# Altium PCB mainBoard.pcbdoc
Units mil, origin at the board's own origin, x right, y up, seen from the top; angles counter-clockwise.
Board outline 3937 x 3937.03 mil, 2 copper layers (Top Layer, Bottom Layer); 19 components, 22 nets, 95 pads, 51 vias.
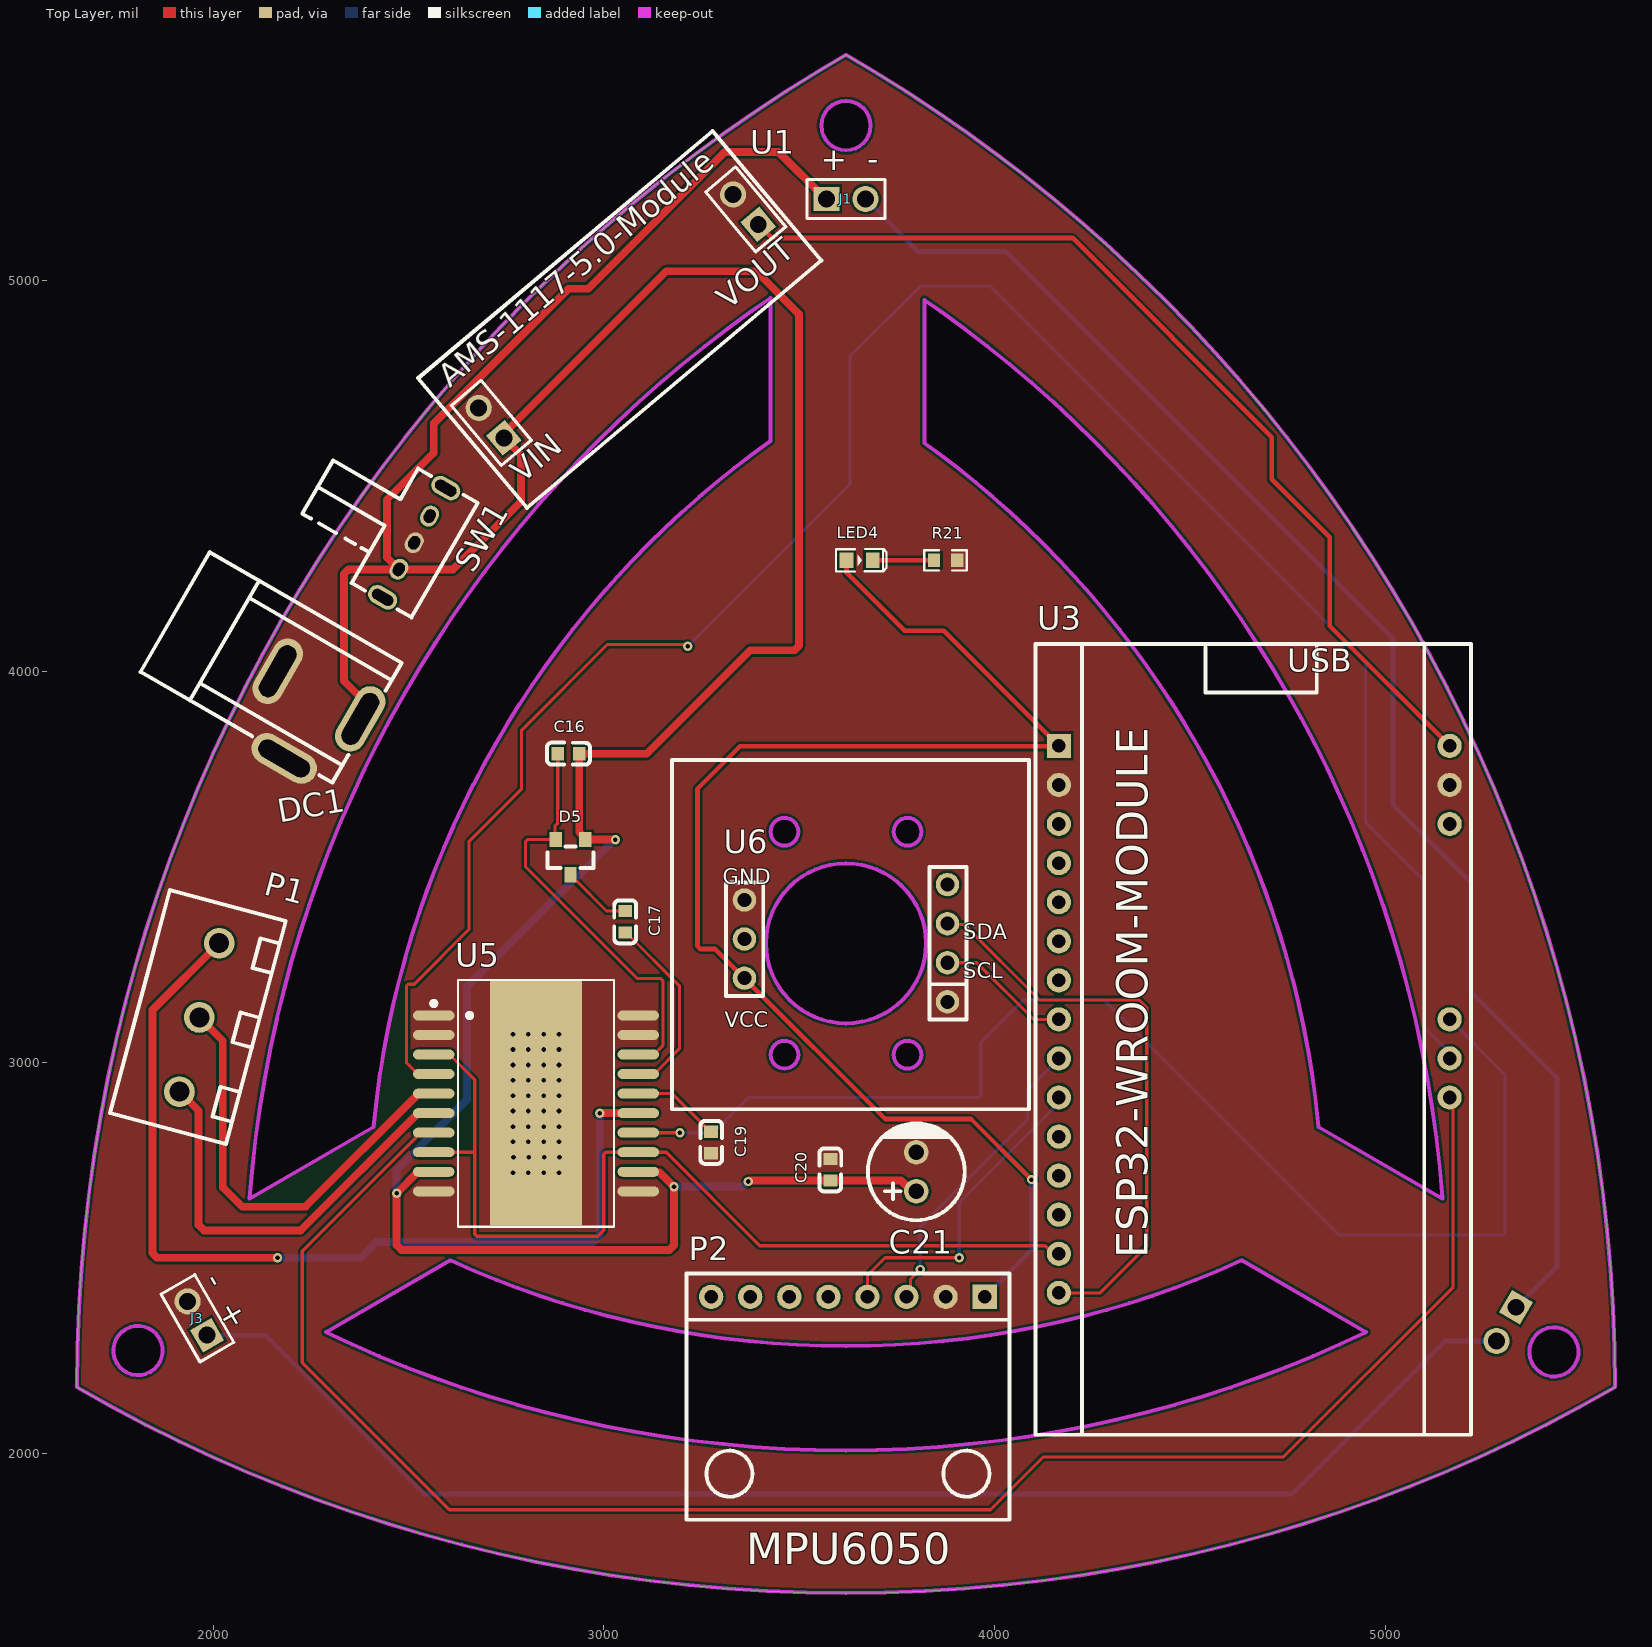
[diagram p0: Top Layer view]
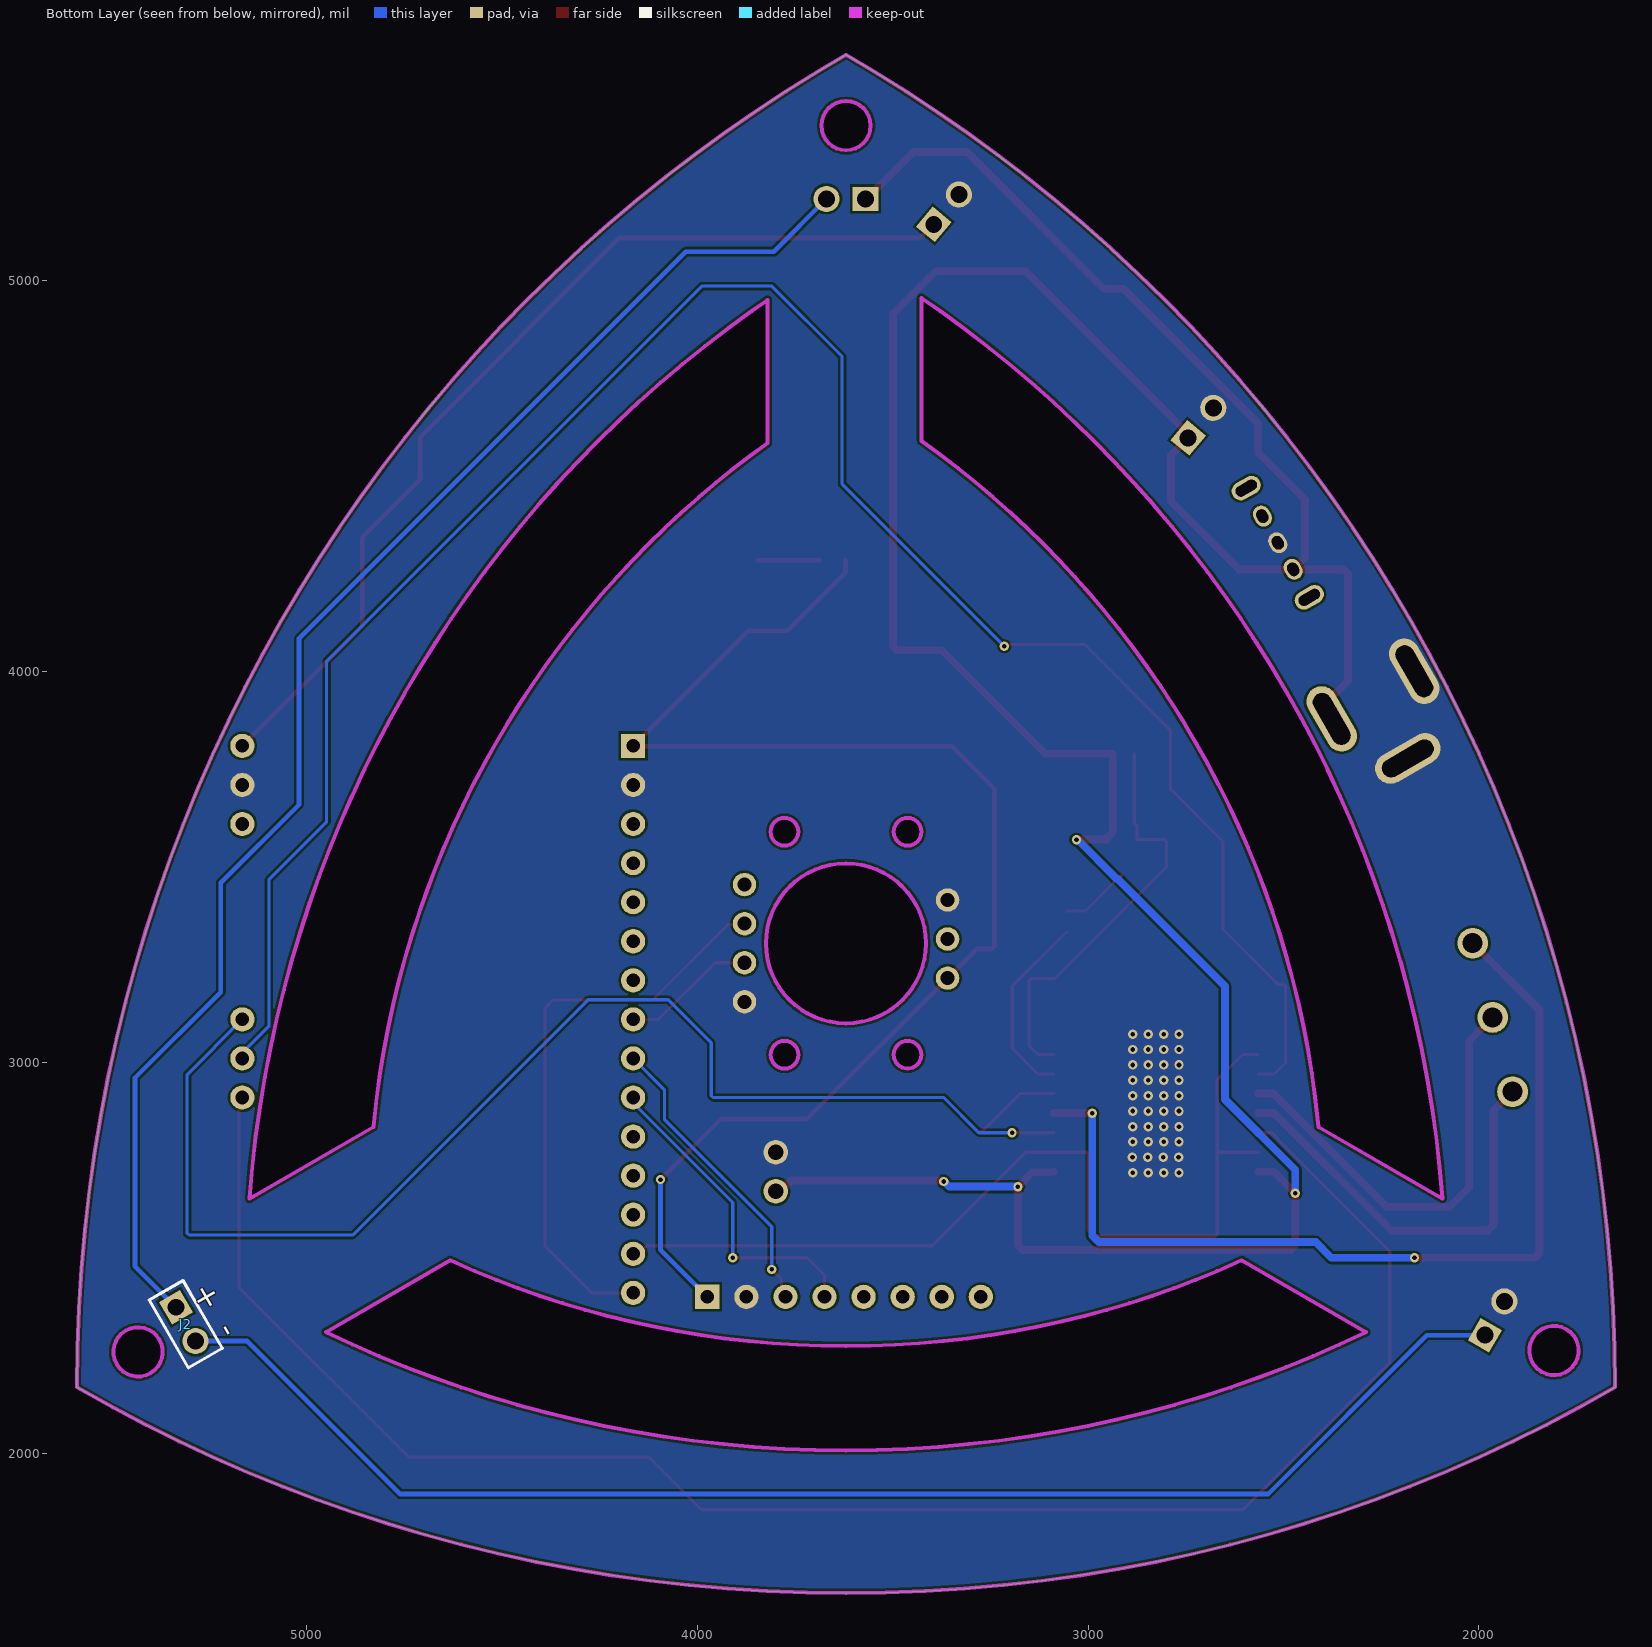
[diagram p1: Bottom Layer view, seen from below]

## Layer stack, top to bottom
Top Solder: solder mask 0.4, Solder Resist, Dk 3.5
Top Layer: signal copper 1.4
Dielectric1: dielectric 12.6, FR-4, Dk 4.8
Bottom Layer: signal copper 1.4
Bottom Solder: solder mask 0.4, Solder Resist, Dk 3.5

## Board outline
1651.59,2168.43 1743.32,2116.76 1827.57,2072.27 1913.1,2029.85 1999.72,1989.39 2087.51,1950.91 2176.39,1914.69 2266.25,1880.44 2357.2,1848.45 2449.22,1818.53 2542.14,1790.87 2636.04,1765.48 2730.82,1742.35 2826.49,1721.58 2923.04,1703.08 3020.38,1686.93 3118.52,1673.15 3217.43,1661.93 3317.04,1653.08 3417.43,1646.68 3518.42,1642.84 3619.99,1641.56 3721.57,1642.84 3822.55,1646.68 3922.94,1653.08 4022.55,1661.93 4121.37,1673.15 4219.6,1686.93 4316.94,1703.08 4413.39,1721.58 4509.07,1742.35 4603.85,1765.48 4697.74,1790.87 4790.76,1818.53 4882.69,1848.45 4973.63,1880.44 5063.59,1914.69 5152.47,1950.91 5240.17,1989.4 5326.78,2029.85 5412.31,2072.27 5496.56,2116.76 5588.59,2168.51 5587.31,2270.01 5583.47,2370.99 5577.07,2471.38 5568.21,2570.99 5557,2669.81 5543.22,2768.04 5527.08,2865.38 5508.57,2961.84 5487.8,3057.51 5464.67,3152.29 5439.28,3246.19 5411.62,3339.2 5381.7,3431.12 5349.71,3522.07 5315.46,3612.03 5279.24,3700.91 5240.76,3788.61 5200.3,3875.22 5157.88,3960.75 5113.39,4045 5066.93,4128.08 5018.61,4209.86 4968.31,4290.38 4916.25,4369.61 4862.21,4447.47 4806.4,4523.94 4748.83,4599.04 4689.58,4672.76 4628.55,4744.9 4565.85,4815.57 4501.48,4884.67 4435.44,4952.28 4367.82,5018.33 4298.73,5082.7 4228.06,5145.4 4155.91,5206.42 4082.19,5265.67 4007.09,5323.25 3930.62,5379.06 3852.76,5433.09 3773.53,5485.16 3693.02,5535.45 3620.01,5578.59 3547.15,5535.45 3466.64,5485.26 3387.41,5433.09 3309.55,5379.06 3233.08,5323.35 3157.98,5265.77 3084.26,5206.42 3012.11,5145.4 2941.44,5082.7 2872.35,5018.33 2804.73,4952.29 2738.69,4884.77 2674.32,4815.57 2611.62,4744.9 2550.6,4672.76 2491.35,4599.14 2433.77,4524.03 2377.96,4447.56 2323.93,4369.71 2271.86,4290.47 2221.56,4209.96 2173.24,4128.17 2126.78,4045.1 2082.29,3960.75 2039.87,3875.32 1999.42,3788.7 1960.94,3700.91 1924.71,3612.03 1890.46,3522.17 1858.47,3431.12 1828.55,3339.2 1800.9,3246.28 1775.5,3152.38 1752.37,3057.6 1731.61,2961.93 1713.1,2865.38 1696.96,2768.03 1683.18,2669.9 1671.96,2570.99 1663.1,2471.38 1656.7,2370.99 1652.87,2270
cut-out: 3442.82,3560.8 3448.82,3557.55 3455.42,3555.49 3462.6,3554.79 3469.79,3555.48 3476.38,3557.55 3482.39,3560.8 3487.7,3565.13 3492.03,3570.44 3495.28,3576.45 3497.35,3583.04 3498.03,3590.23 3497.34,3597.41 3495.28,3604.01 3492.03,3610.01 3487.7,3615.32 3482.39,3619.66 3476.38,3622.91 3469.79,3624.97 3462.6,3625.66 3455.42,3624.97 3448.82,3622.91 3442.82,3619.66 3437.5,3615.32 3433.18,3610.01 3429.93,3604.01 3427.86,3597.41 3427.17,3590.23 3427.86,3583.04 3429.93,3576.45 3433.18,3570.44 3437.5,3565.13
cut-out: 2093.39,2653.27 2100.48,2733.79 2109.24,2810.95 2119.98,2887.49 2132.58,2963.42 2147.01,3038.73 2163.21,3113.35 2181.25,3187.29 2201.05,3260.52 2222.62,3333 2245.96,3404.7 2270.92,3475.72 2297.63,3545.81 2325.88,3615.13 2355.9,3683.61 2387.45,3751.17 2420.54,3817.81 2455.24,3883.6 2491.48,3948.4 2529.18,4012.19 2568.4,4075 2609.02,4136.8 2651.17,4197.52 2694.7,4257.18 2739.61,4315.75 2785.82,4373.18 2833.42,4429.45 2882.33,4484.58 2932.53,4538.54 2984.05,4591.21 3036.79,4642.72 3090.69,4692.93 3145.8,4741.84 3202.08,4789.43 3259.58,4835.73 3318.16,4880.64 3377.81,4924.09 3427.02,4958.25 3427.02,4592.74 3380.09,4558.56 3333.53,4522.86 3287.82,4486.06 3243.09,4448.23 3199.28,4409.36 3156.44,4369.45 3114.52,4328.5 3073.57,4286.64 3033.66,4243.75 2994.79,4199.93 2956.96,4155.2 2920.22,4109.56 2884.53,4063 2849.93,4015.58 2816.42,3967.31 2784.15,3918.19 2752.96,3868.28 2723,3817.57 2694.2,3766.06 2666.62,3713.77 2640.32,3660.8 2615.23,3607.1 2591.37,3552.67 2568.92,3497.57 2547.68,3441.85 2527.85,3385.41 2509.3,3328.41 2492.15,3270.81 2476.41,3212.59 2462.07,3153.83 2449.19,3094.52 2437.72,3034.65 2427.71,2974.3 2419.17,2913.46 2410.83,2836.54
cut-out: 4355.67,4061.01 4319.98,4107.58 4283.24,4153.28 4245.41,4198.01 4206.54,4241.83 4166.63,4284.66 4125.68,4326.59 4083.76,4367.53 4040.92,4407.44 3997.11,4446.31 3952.38,4484.15 3906.67,4520.88 3860.11,4556.58 3820.86,4585.22 3820.87,4950.99 3862.39,4922.17 3922.04,4878.64 3980.61,4833.73 4038.12,4787.51 4094.39,4739.92 4149.52,4691.02 4203.41,4640.81 4256.15,4589.29 4307.67,4536.55 4357.87,4482.65 4406.78,4427.53 4454.38,4371.26 4500.59,4313.76 4545.5,4255.18 4589.03,4195.53 4631.18,4134.8 4671.79,4073 4711.02,4010.2 4748.72,3946.41 4784.95,3881.61 4819.65,3815.89 4852.74,3749.18 4884.3,3681.62 4914.32,3613.22 4942.57,3543.89 4969.28,3473.72 4994.23,3402.78 5017.57,3331.08 5039.15,3258.53 5058.95,3185.29 5076.99,3111.36 5093.19,3036.74 5107.63,2961.5 5120.22,2885.57 5130.96,2808.96 5139.72,2731.88 5146.81,2651.26 4829.38,2834.54 4821.03,2911.49 4812.49,2972.39 4802.48,3032.73 4791.01,3092.54 4778.13,3151.85 4763.79,3210.61 4748.05,3268.83 4730.89,3326.5 4712.35,3383.49 4692.52,3439.87 4671.28,3495.65 4648.82,3550.75 4624.97,3605.12 4599.88,3658.82 4573.59,3711.85 4546,3764.08 4517.2,3815.59 4487.24,3866.3 4456.06,3916.21 4423.77,3965.33 4390.27,4013.6
cut-out: 3748.13,3570.44 3744.88,3576.45 3742.82,3583.04 3742.13,3590.23 3742.82,3597.41 3744.88,3604.01 3748.13,3610.01 3752.46,3615.32 3757.78,3619.66 3763.78,3622.9 3770.38,3624.97 3777.56,3625.66 3784.75,3624.97 3791.34,3622.91 3797.35,3619.66 3802.66,3615.33 3806.99,3610.01 3810.24,3604.01 3812.31,3597.41 3812.99,3590.23 3812.31,3583.04 3810.24,3576.45 3806.99,3570.45 3802.66,3565.13 3797.34,3560.8 3791.34,3557.55 3784.75,3555.49 3777.56,3554.8 3770.38,3555.48 3763.78,3557.55 3757.78,3560.8 3752.46,3565.13
cut-out: 3450.42,3190.22 3440.19,3207.11 3431.57,3225.03 3424.66,3243.79 3419.63,3263.41 3416.47,3283.8 3415.45,3304.7 3416.47,3325.59 3419.63,3345.98 3424.66,3365.6 3431.57,3384.37 3440.19,3402.28 3450.42,3419.17 3462.2,3434.95 3475.42,3449.45 3489.92,3462.68 3505.7,3474.45 3522.59,3484.69 3540.5,3493.3 3559.27,3500.21 3578.89,3505.24 3599.28,3508.4 3620.17,3509.42 3641.07,3508.4 3661.38,3505.24 3680.99,3500.21 3699.85,3493.3 3717.76,3484.68 3734.65,3474.45 3750.35,3462.68 3764.93,3449.46 3778.16,3434.95 3789.93,3419.17 3800.16,3402.28 3808.78,3384.37 3815.69,3365.61 3820.72,3345.98 3823.88,3325.6 3824.9,3304.7 3823.79,3283.71 3820.72,3263.41 3815.69,3243.8 3808.78,3225.03 3800.16,3207.11 3789.93,3190.22 3778.16,3174.53 3764.93,3159.94 3750.35,3146.72 3734.65,3134.95 3717.76,3124.71 3699.85,3116.1 3681.08,3109.18 3661.46,3104.15 3641.07,3101 3620.17,3099.97 3599.28,3101 3578.89,3104.15 3559.27,3109.18 3540.5,3116.1 3522.59,3124.71 3505.7,3134.95 3489.92,3146.72 3475.42,3159.94 3462.2,3174.52
cut-out: 3748.03,2999.68 3744.79,3005.68 3742.72,3012.28 3742.03,3019.46 3742.72,3026.65 3744.79,3033.24 3748.03,3039.24 3752.36,3044.56 3757.68,3048.89 3763.68,3052.14 3770.28,3054.21 3777.46,3054.89 3784.65,3054.21 3791.24,3052.14 3797.25,3048.89 3802.56,3044.56 3806.89,3039.24 3810.14,3033.24 3812.21,3026.65 3812.9,3019.46 3812.21,3012.28 3810.14,3005.68 3806.89,2999.68 3802.56,2994.36 3797.25,2990.03 3791.24,2986.79 3784.65,2984.72 3777.46,2984.03 3770.28,2984.72 3763.68,2986.78 3757.68,2990.03 3752.37,2994.36
cut-out: 3427.96,3012.38 3427.27,3019.55 3427.95,3026.64 3430.02,3033.34 3433.27,3039.34 3437.6,3044.56 3442.82,3048.89 3448.82,3052.23 3455.52,3054.3 3462.6,3054.99 3469.79,3054.31 3476.38,3052.24 3482.39,3048.89 3487.7,3044.56 3492.03,3039.34 3495.28,3033.34 3497.35,3026.64 3498.03,3019.56 3497.35,3012.38 3495.28,3005.78 3492.03,2999.77 3487.7,2994.46 3482.39,2990.13 3476.38,2986.88 3469.79,2984.81 3462.6,2984.12 3455.51,2984.81 3448.82,2986.88 3442.82,2990.13 3437.6,2994.46 3433.27,2999.78 3430.02,3005.78
cut-out: 5375.41,2231.33 5381.71,2220.99 5390.18,2211.94 5400.51,2204.46 5412.12,2199.24 5424.23,2196.48 5436.44,2196.19 5448.35,2198.16 5459.66,2202.39 5470.1,2208.69 5479.15,2217.16 5486.63,2227.49 5491.85,2239.1 5494.6,2251.21 5494.9,2263.32 5492.93,2275.22 5488.7,2286.55 5482.3,2296.98 5473.84,2306.03 5463.5,2313.51 5451.89,2318.73 5439.78,2321.48 5427.68,2321.78 5415.77,2319.81 5404.45,2315.58 5394.01,2309.28 5384.96,2300.82 5377.48,2290.48 5372.26,2278.87 5369.51,2266.76 5369.21,2254.55 5371.18,2242.65
cut-out: 2779.37,2123.38 2852.61,2103.58 2926.54,2085.53 3001.17,2069.34 3076.47,2054.9 3152.41,2042.31 3228.95,2031.56 3306.1,2022.81 3383.8,2015.9 3462.1,2010.91 3540.87,2007.92 3620.1,2006.92 3699.33,2007.92 3778.09,2010.91 3856.4,2015.9 3934.09,2022.81 4011.18,2031.56 4087.79,2042.31 4163.72,2054.9 4238.95,2069.34 4313.58,2085.54 4387.51,2103.58 4460.75,2123.38 4533.3,2144.96 4605,2168.3 4675.94,2193.25 4746.11,2219.96 4815.43,2248.22 4883.84,2278.23 4951.1,2309.65 4632.76,2493.45 4570.23,2465.78 4515.13,2443.32 4459.35,2422.09 4402.97,2402.25 4345.97,2383.7 4288.31,2366.56 4230.09,2350.81 4171.33,2336.47 4112.02,2323.6 4052.21,2312.13 3991.86,2302.12 3930.96,2293.57 3869.7,2286.62 3807.94,2281.12 3745.7,2277.16 3683.09,2274.78 3620.11,2273.99 3557.14,2274.78 3494.53,2277.16 3432.29,2281.12 3370.53,2286.62 3309.2,2293.57 3248.37,2302.12 3188.02,2312.13 3128.16,2323.6 3068.84,2336.47 3010.08,2350.81 2951.86,2366.56 2894.26,2383.7 2837.2,2402.25 2780.82,2422.08 2725.1,2443.32 2670,2465.78 2607.43,2493.44 2289.07,2309.63 2356.28,2278.23 2424.76,2248.22 2494.09,2219.96 2564.18,2193.24 2635.12,2168.3 2706.9,2144.96
cut-out: 1753.46,2230.83 1748.25,2242.45 1745.49,2254.55 1745.2,2266.76 1747.16,2278.67 1751.4,2289.99 1757.7,2300.42 1766.16,2309.48 1776.49,2316.96 1788.11,2322.18 1800.22,2324.93 1812.42,2325.22 1824.33,2323.26 1835.65,2319.02 1845.98,2312.63 1855.04,2304.16 1862.52,2293.83 1867.73,2282.21 1870.49,2270.11 1870.79,2258 1868.82,2246.09 1864.59,2234.77 1858.29,2224.34 1849.82,2215.28 1839.49,2207.8 1827.87,2202.59 1815.77,2199.83 1803.66,2199.54 1791.75,2201.5 1780.43,2205.74 1770,2212.04 1760.94,2220.5
cut-out: 3567.74,5362.33 3561.93,5373.06 3558.29,5384.87 3557.01,5397.57 3558.29,5410.26 3561.93,5422.08 3567.74,5432.81 3575.51,5442.15 3584.76,5449.83 3595.49,5455.64 3607.3,5459.28 3620,5460.56 3632.7,5459.28 3644.51,5455.64 3655.24,5449.83 3664.59,5442.15 3672.26,5432.81 3678.07,5422.08 3681.71,5410.26 3682.99,5397.57 3681.71,5384.87 3678.07,5373.06 3672.26,5362.33 3664.59,5353.08 3655.24,5345.3 3644.51,5339.5 3632.7,5335.85 3620,5334.57 3607.3,5335.85 3595.49,5339.5 3584.76,5345.3 3575.51,5353.08

## Design rules (kind name [scope] priority, off if disabled: settings)
Clearance [All] p1: gap=6 ignorepadtopadclearanceinfootprint=FALSE
ComponentClearance [All] p1: gap=5 collisioncheckmode=3 verticalgap=5 showdistances=FALSE
HoleSize [All] p1: absolutevalues=TRUE maxlimit=200 minlimit=1 maxpercent=80.000 minpercent=20.000
MinimumSolderMaskSliver [All] p1: minsoldermaskwidth=5
PlaneClearance [All] p1: clearance=10
PlaneConnect [All] p1: planeconnectstyle=Direct reliefexpansion=20 reliefentries=4 reliefconductorwidth=10 reliefairgap=10
PolygonConnect [All] p1: connectstyle=Direct reliefconductorwidth=10 reliefentries=4 polygonreliefangle="90 Angle" airgapwidth=10
RoutingVias [All] p1: holewidth=11.81 width=23.62 viastyle="Through Hole" minholewidth=11.81 minwidth=23.62 maxholewidth=28 maxwidth=23.62
SilkToSilkClearance [All] p1: silktosilkclearance=0
SilkToSolderMaskClearance [IsPad] p1: minsilkscreentomaskgap=0 clearancetoexposedcopper=TRUE
SolderMaskExpansion [All] p1: expansion=4 istentingtop=FALSE
Width [All] p1: maxlimit=20 minlimit=6 preferedwidth=10
23 further rules are at their usual default settings.

## Components (designator, comment, footprint, x,y, rotation, side; value= is the part's Value field where it differs from the comment)
C16 "220nF" C0603 2910,3790 r0 top
C17 "10nF" C0603 3055,3360 r90 top
C19 "1uF" C0603 3275,2795 r270 top
C20 "100nF" C0603 3580,2725 r90 top
C21 "100uF" CAP-TH_BD6.3-P2.50-D1.0-FD 3800,2720 r90 top
D5 "LBAT54SLT1G" SOT-23_L2.9-W1.3-P1.90-LS2.4-BR 2915,3525 r90 top
DC1 "12V INPUT" DC-IN-TH_DC005 2225,3860 r330 top
J1 "HDR-M-2.54_1x2" HDR-M-2.54_1X2 3620,5210 r0 top
J2 "HDR-M-2.54_1x2" HDR-M-2.54_1X2 5310,2330 r240 bottom
J3 "HDR-M-2.54_1x2" HDR-M-2.54_1X2 1960,2345 r120 top
LED4 "LED-0603_R" LED0603_RED 3655,4285 r0 top
P1 "WJ126V-5.0-3P" CONN-TH_3P-P5.00_WJ126V-5.0-3P 1964.99,3114.95 r255 top
P2 "MPU6050模块" MPU6050模块 3275,2400 r270 top
R21 "1K" R0603 3875,4285 r180 top
SW1 "SK-12D02-VG5" SW-TH_SK-12D02-VG5 2515,4330 r240 top
U1 "AMS1117-5.0-Module" AMS1117-3.3-MODULE 2566.29,4227.12 r40 top
U3 "ESP_32_WROOM_Module" ESP32_MODULE 4080,3226.85 r0 top
U5 "L6234PD013TR" POWERSO20_L15.9-W11.0-P1.27-LS14.2-BL-EP 2826.72,2895 r270 top
U6 "AS5600_Modle" AS5600_MODLE 3620,3305 r0 top

## Footprints (in the part's own frame and the unit in brackets; to place one, negate y for a bottom-side part, rotate by r counter-clockwise, add the part's x,y. Pads: shape width x height; smd on the part's side, far side on the other; paste and mask are expansions set on the pad)
AMS1117-3.3-MODULE [mil]
  rect 62x66.93 hole 43.31: 1(375,170) 3(1225,170)
  round 66.93 hole 43.31: 2(375,270) 4(1225,270)
  silkscreen extent 305,-5 1289,428
AS5600_MODLE [mil]
  round 60 hole 36: 1(-259.84,110.63) 2(-259.84,10.63) 3(-259.84,-89.37) 4(259.84,150) 5(259.84,50) 6(259.84,-50) 7(259.84,-150)
  silkscreen extent -445,-425 468,469
C0603 [mm]
  rect 0.8x0.9 smd: 1(-0.7,0) 2(0.7,0)
  silkscreen extent -1.41,-0.71 1.39,0.72
CAP-TH_BD6.3-P2.50-D1.0-FD [mm]
  round 1.6 hole 1: 1(-1.27,0) 2(1.27,0)
  silkscreen extent -3.15,-3.15 3.17,3.15
CONN-TH_3P-P5.00_WJ126V-5.0-3P [mm]
  round 2 hole 1.3: 1(5,0) 2(-0.001,0) 3(-5,0)
  silkscreen extent -7.5,-4 7.5,3.8
DC-IN-TH_DC005 [mm]
  oval 2x4.6 hole 1.2 slot 3.7 at 90 deg: 1(3.1,2.35) 2(-3.1,2.35)
  oval 4.6x2 hole 1.2 slot 3.7 at 0 deg: 3(0.1,-2.35)
  silkscreen extent -10.8,-2.15 3.6,6.85
ESP32_MODULE [mil]
  rect 62x62 hole 35: 1(85,583.15)
  round 62 hole 35: 2(85,483.15) 3(85,383.15) 4(85,283.15) 5(85,183.15) 6(85,83.15) 7(85,-16.85) 8(85,-116.85) 9(85,-216.85) 10(85,-316.85) 11(85,-416.85) 12(85,-516.85) 13(85,-616.85) 14(85,-716.85) 15(85,-816.85) 21(1085,-316.85) 22(1085,-216.85) 23(1085,-116.85) 28(1085,383.15) 29(1085,483.15) 30(1085,583.15)
  silkscreen extent 25,-1180 1140,845
HDR-M-2.54_1X2 [mm]
  rect 1.7x1.575 hole 1.1: 1(-1.27,0)
  round 1.7 hole 1.1: 2(1.27,0)
  silkscreen extent -2.54,-1.27 2.54,1.27
LED0603_RED [mm]
  rect 0.9x1 smd: 1(-0.85,0) 2(0.85,0)
  silkscreen extent -1.54,-0.73 1.75,0.73
MPU6050模块 [mil]
  rect 62x62 hole 35: 1(0,700)
  round 62 hole 35: 2(0,600) 3(0,500) 4(0,400) 5(0,300) 6(0,200) 7(0,100) 8(0,0)
  silkscreen extent -59,-63 571,763
POWERSO20_L15.9-W11.0-P1.27-LS14.2-BL-EP [mm]
  oval 0.651x2.695 smd: 1(-5.715,-6.648) 2(-4.445,-6.648) 3(-3.175,-6.648) 4(-1.905,-6.648) 5(-0.635,-6.648) 6(0.635,-6.648) 7(1.905,-6.648) 8(3.175,-6.648) 9(4.445,-6.648) 10(5.715,-6.648) 11(5.715,6.648) 12(4.445,6.648) 13(3.175,6.648) 14(1.905,6.648) 15(0.635,6.648) 16(-0.635,6.648) 17(-1.905,6.648) 18(-3.175,6.648) 19(-4.445,6.648) 20(-5.715,6.648)
  rect 15.9x6 smd: 21(0,0)
  silkscreen extent -8.03,-6.8 8.03,5.07
R0603 [mil]
  rect 31.75x34.02 smd: 1(-29.65,0) 2(29.65,0)
  silkscreen extent -55,-26 55,26
SOT-23_L2.9-W1.3-P1.90-LS2.4-BR [mm]
  rect 1x0.8 smd: 1(1.15,-0.95) 2(1.15,0.95) 3(-1.15,0)
  silkscreen extent -0.7,-1.5 0.7,1.5
SW-TH_SK-12D02-VG5 [mm]
  oval 1.4x1.1 hole 0.7 slot 0.9 at 0 deg: 1(-2,0.001) 2(0,0) 3(2,-0.001)
  oval 1.2x2 hole 0.7 slot 1.5 at 90 deg: 4(4.1,0) 5(-4.1,0)
  silkscreen extent -4.3,-7.25 4.3,2.27

## Part data
C16: library part 1uF, Contributor=LCEDA_Lib, nameAlias=Value(F), spicePre=C, spiceSymbolName=C_0603_US
C17: BOM_JLCPCB Part Class="Extended Part", BOM_Manufacturer=YAGEO, BOM_Manufacturer Part=CC0603KRX7R9BB103, BOM_Supplier=LCSC, BOM_Supplier Part=C100042, nameAlias=Capacitance, spicePre=C, spiceSymbolName=CC0603KRX7R9BB103
C19: library part 220nF, Contributor=LCEDA_Lib, nameAlias=Value(F), spicePre=C, spiceSymbolName=C_0603_US
C20: Package Display=No, BOM_Supplier=LCSC, BOM_Supplier Part=C14663, Contributor=LCEDA_Lib, nameAlias=Value(F), spicePre=C, spiceSymbolName=C_0603_US
C21: BOM_JLCPCB Part Class="Extended Part", BOM_Manufacturer=ValuePro, BOM_Manufacturer Part="100uF 25V 6.3*7", BOM_Supplier=LCSC, BOM_Supplier Part=C44587, nameAlias=Capacitance, spicePre=C, spiceSymbolName="100uF 25V 6.3*7"
D5: BOM_JLCPCB Part Class="Extended Part", BOM_Manufacturer=LRC, BOM_Manufacturer Part=LBAT54SLT1G, BOM_Supplier=LCSC, BOM_Supplier Part=C12765, spicePre=D, spiceSymbolName=LBAT54SLT1G
DC1: library part 总电源输入5V, BOM_Manufacturer="Shenzhen Cankemeng", BOM_Manufacturer Part=-, BOM_Supplier=LCSC, BOM_Supplier Part=C132516, Contributor=LCSC, spicePre=D, spiceSymbolName="dc-005 5.5-2.0"
LED4: BOM_Manufacturer=EVERLIGHT(台湾亿光), BOM_Manufacturer Part=19-217/R6C-AL1M2VY/3T, BOM_Supplier=LCSC, BOM_Supplier Part=C72044, Contributor=LCEDA_01, spicePre=L, spiceSymbolName=LED-0603_R
P1: BOM_JLCPCB Part Class="Extended Part", BOM_Manufacturer=ReliaPro, BOM_Manufacturer Part=WJ126V-5.0-3P, BOM_Supplier=LCSC, BOM_Supplier Part=C8401, spicePre=P, spiceSymbolName=WJ126V-5.0-3P
SW1: BOM_JLCPCB Part Class="Extended Part", BOM_Manufacturer="Rectangular Connectors - Contacts", BOM_Manufacturer Part=SK-12D02-VG5, BOM_Supplier=LCSC, BOM_Supplier Part=C136722, Contributor=LCSC, spicePre=S, spiceSymbolName=SK-12D02-VG5
U5: BOM_JLCPCB Part Class="Extended Part", BOM_Manufacturer=STMicroelectronics, BOM_Manufacturer Part=L6234PD013TR, BOM_Supplier=LCSC, BOM_Supplier Part=C77581, spicePre=U, spiceSymbolName=L6234PD013TR
J1 J2 J3: BOM_Supplier=LCSC, BOM_Supplier Part=C124375, Contributor=LCEDA_Lib, spicePre=J, spiceSymbolName=HDR-M-2.54_1x2
P2: spicePre=P, spiceSymbolName=MPU6050模块
R21: Contributor=LCEDA_Lib, nameAlias=Value(Ω), spicePre=R, spiceSymbolName=R_0603_EU
U6: Contributor=45coll, spicePre=U, spiceSymbolName=AS5600_Modle, 淘宝ID=https://item.taobao.com/item.htm?spm=a1z09.2.0.0.2d022e8duL4IzW&id=622544987536&_u=31sddf3scb0c

## Via types
v1: diameter 24, hole 12, Top Layer to Bottom Layer, 40 vias
v2: diameter 23.62, hole 11.81, Top Layer to Bottom Layer, tented both sides, 11 vias

## Nets (pads, with @x,y where several pads share a name; then routed paths per layer and width w, separated by ;. In a path a pad name is that pad's centre, name@x,y a point inside that pad or via, vN(x,y) a via of type N, cw(c..) or ccw(c..) an arc to the next point about the centre after c; other vN are vias at no path point)
5Vin: U1.3 U3.30 | length 2518.7
  Top Layer w12: U1.3 3430.18,5110 4200,5110 4710,4600 4710,4492.23 4858.13,4344.1 4858.13,4116.87 U3.30
+3.3V: LED4.1 P2.1 U3.1 U6.3 | length 3589.1
  Top Layer w12: LED4.1 3621.53,4253.47 3770,4105 3870,4105 U3.1@4164.88,3810.12 ; v2(4095,2700) 3940,2855 3720.78,2855 U6.3 3285.78,3290 3247.03,3290 3240,3297.03 3240,3700 3348.83,3808.83 4163.83,3808.83 U3.1
  Bottom Layer w12: P2.1 4095,2520 v2(4095,2700) v2@4100,2700
BatVin: C16.2 C20.1 C21.1 D5.1 DC1.1 J1.1 SW1.3 U1.1 U5.9 U5.12 | length 8696.9
  Top Layer w20: DC1.1 2376.95,3934.88 2335,3976.83 2335,4250.11 2346.72,4261.83 SW1.3 ; U5.9 2524.75,2720 v2(2470,2665.25) 2470,2531.72 2481.72,2520 3168.28,2520 3180,2531.72 v2(3180,2681.88) 3142.96,2718.92 3089.52,2718.92 U5.12 ; v2(3030,3570) 3029.86,3570.14 2952.54,3570.14 D5.1 2952.41,3574.21 2937.55,3589.06 C16.2 3110,3790 3375,4055 3488.28,4055 3500,4066.72 3500,4915 3390,5025 3160.23,5025 2744.28,4609.05 U1.1 2788.59,4554.08 2788.59,4436.03 2614.39,4261.83 SW1.3 ; v2(3370,2695) 3372.45,2697.45 C20.1 3760.92,2697.45 3788.37,2670 C21.1 ; J1.1 3567.54,5210 3447.54,5330 3310,5330 2960,4980 2910,4980 2565,4635 2565,4560 2445,4440 2445,4292.43 SW1.3
  Bottom Layer w20: v2(2470,2665.25) 2470,2725 2650,2905 2650,3195 2925,3470 2927.63,3470 3025.82,3568.19 3027.21,3568.19 3029.02,3570 v2(3030,3570) ; v2(3180,2681.88) 3355.9,2681.88 3369.02,2695 v2(3370,2695)
GND: C19.2 C20.2 C21.2 DC1.2 DC1.3 J3.2 P2.2 R21.1 SW1.2 U1.2 U1.4 U3.2 U3.29 U5.1 U5.2 U5.10 U5.11 U5.19 U5.20 U5.21 U6.1 U6.7
  other v1: 2767.67,2717.84 2807.04,2717.84 2846.41,2717.84 2885.78,2717.84 2768.86,2757.2 2808.23,2757.2 2847.6,2757.2 2886.96,2757.2 2767.67,2796.57 2807.04,2796.57 2846.41,2796.57 2885.78,2796.57 2767.67,2835.34 2807.04,2835.34 2846.41,2835.34 2885.78,2835.34 2767.67,2875.32 2807.04,2875.32 2846.41,2875.32 2885.78,2875.32 2767.67,2914.68 2807.04,2914.68 2846.41,2914.68 2885.78,2914.68 2767.67,2954.05 2807.04,2954.05 2846.41,2954.05 2885.78,2954.05 2767.67,2993.43 2807.04,2993.43 2846.41,2993.43 2885.78,2993.43 2767.67,3032.8 2807.04,3032.8 2846.41,3032.8 2885.78,3032.8 2767.67,3072.16 2807.04,3072.16 2846.41,3072.16 2885.78,3072.16
M0_EN: U3.14 U5.3 U5.8 U5.13 | length 2442.4
  Top Layer w8: U5.8 2665.31,2770 2670,2765.31 ; U5.3 2605.25,3020 2670,2955.25 2670,2765.31 ; U3.14 4150.39,2510 4129.68,2530.7 3399.3,2530.7 3160,2770 U5.13 3004.69,2770 3000,2765.31 3000,2570 2985,2555 2674.69,2555 2670,2559.69 2670,2765.31
M0_IN1: U3.21 U5.7 | length 4575.2
  Top Layer w8: U5.7 2529.52,2820 2518.72,2809.2 2518.72,2806.94 2228.44,2516.65 2228.44,2231.56 2605,1855 3990,1855 4125,1990 4739.4,1990 5174.02,2424.62 5174.02,2900.98 U3.21
M0_IN2: U3.22 U5.4 | length 5392.9
  Top Layer w8: U5.4 2524.75,2970 2495,2999.75 2495,3195.31 2499.69,3200 2515,3200 2655,3340 2655,3565 2789.92,3699.92 2789.92,3849.92 3009.7,4069.7 3202.5,4069.7 3204.21,4067.99 3212.01,4067.99 v2(3215,4065)
  Bottom Layer w8: v2(3215,4065) 3630,4480 3630,4806.71 3810.16,4986.87 3988.97,4986.87 4949.36,4026.49 4949.36,3615.64 5097.34,3467.66 5097.34,3092.27 5165,3024.61 U3.22
M0_IN3: U3.23 U5.14 | length 3295.4
  Top Layer w8: U5.14 v2(3195,2820)
  Bottom Layer w8: v2(3195,2820) 3280,2820 3370,2910 3960.31,2910 3965,2914.69 3965,3050 4075.1,3160.1 4279.9,3160.1 4879.67,2560.33 4882.02,2557.98 5301.75,2557.98 5306.43,2562.67 5306.43,2968.57 U3.23
M0_OUT1: P1.1 U5.6 | length 1093.3
  Top Layer w20: P1.1 1963.09,2875.76 1963.09,2583.62 1976.72,2570 2224.75,2570 2524.75,2870 U5.6
M0_OUT2: P1.2 U5.5 | length 1140.4
  Top Layer w20: P1.2 2025,3055 2025,2680 2074.65,2630.35 2236.4,2630.35 2526.06,2920 U5.5
M0_OUT3: P1.3 U5.15 | length 2449.3
  Top Layer w20: P1.3 1845,3134.16 1845,2511.72 1856.72,2500 v2(2165,2500) ; v2(2990,2870) U5.15
  Bottom Layer w20: v2(2165,2500) 2377.99,2500 2417.99,2540 2973.28,2540 2990,2556.72 v2(2990,2870)
NetC16_1: C16.1 D5.2 U5.18 | length 1079.3
  Top Layer w8: C16.1 2882.45,3612.45 2875,3605 2875,3572.87 D5.2 2877.32,3570 2804.69,3570 2800,3565.31 2800,3500 3085,3215 3145,3215 3151.51,3208.49 3151.51,3042.82 3128.69,3020 U5.18
NetC17_1: C17.1 U5.17 | length 488.8
  Top Layer w8: C17.1 3056.97,3332.45 3194.41,3195 3194.41,3035.72 3128.69,2970 U5.17
NetC17_2: C17.2 D5.3 | length 180.5
  Top Layer w8: D5.3 2915,3475.79 2926.75,3464.04 2930.68,3464.04 3007.17,3387.55 C17.2
NetC19_1: C19.1 U5.16 | length 226.9
  Top Layer w8: U5.16 3175.59,2920 3273.03,2822.55 C19.1
NetJ1_2: J1.2 J2.1 | length 3745.2
  Bottom Layer w12: J1.2 3805,5075 4030,5075 5020,4085 5020,3660 5220,3460 5220,3180 5440,2960 5440,2478.3 J2.1
NetJ2_2: J2.2 J3.1 | length 3630.7
  Bottom Layer w12: J3.1 2133.3,2301.7 2540,1895 4760.91,1895 5152.61,2286.7 J2.2
NetLED4_2: LED4.2 R21.2 | length 156.9
  Top Layer w12: LED4.2 R21.2
SCL_0: P2.3 U3.9 | length 771.5
  Top Layer w8: P2.3 3785.33,2410.33 3785.33,2445.33 v2(3810,2470)
  Bottom Layer w8: v2(3810,2470) 3810,2579.38 4085,2854.38 4085,2930 U3.9
SCL_1: U3.8 U6.6 | length 345.2
  Top Layer w8: U6.6 3955,3255 4100,3110 U3.8
SDA_0: P2.4 U3.10 | length 824.3
  Top Layer w8: P2.4 3675,2455 3720,2500 v2(3910,2500)
  Bottom Layer w8: v2(3910,2500) 3910,2641.17 4165,2896.17 U3.10
SDA_1: U3.15 U6.5 | length 1484.5
  Top Layer w8: U6.5 3881.68,3353.16 3921.84,3353.16 4115.35,3159.65 4370.35,3159.65 4390,3140 4390,2529.02 4270.98,2410 U3.15
pads on no net: P2.5 P2.6 P2.7 P2.8 SW1.1 SW1.4 SW1.5 U3.3 U3.4 U3.5 U3.6 U3.7 U3.11 U3.12 U3.13 U3.28 U6.2 U6.4

## Polygon pours and split planes (outlines as drawn)
GND on Bottom Layer "GND_L02_P001" (solid, remove dead copper, pour order 1): 1372.5,5725 1472.5,5625 5922.5,5625 5922.5,1765 5772.5,1615 1087.5,1615 1087.5,5435 1382.5,5730
GND on Top Layer "GND_L01_P000" (solid, remove dead copper, pour order 0): 1540,5670 1580,5630 5850,5630 5850,1675 5745,1570 1305,1570 1305,5420 1550,5665

## Keep-outs
Keep-Out Layer:
  pour cut-out: 3433.18,3570.44 3429.93,3576.45 3427.86,3583.04 3427.17,3590.23 3427.86,3597.41 3429.93,3604.01 3433.18,3610.01 3437.5,3615.32 3442.82,3619.66 3448.82,3622.91 3455.42,3624.97 3462.6,3625.66 3469.79,3624.97 3476.38,3622.91 3482.39,3619.66 3487.7,3615.32 3492.03,3610.01 3495.28,3604.01 3497.34,3597.41 3498.03,3590.23 3497.35,3583.04 3495.28,3576.45 3492.03,3570.44 3487.7,3565.13 3482.39,3560.8 3476.38,3557.55 3469.79,3555.48 3462.6,3554.79 3455.42,3555.49 3448.82,3557.55 3442.82,3560.8 3437.5,3565.13
  lines w10: 1651.59,2168.43 1652.87,2270 1656.7,2370.99 1663.1,2471.38 1671.96,2570.99 1683.18,2669.9 1696.96,2768.03 1713.1,2865.38 1731.61,2961.93 1752.37,3057.6 1775.5,3152.38 1800.9,3246.28 1828.55,3339.2 1858.47,3431.12 1890.46,3522.17 1924.71,3612.03 1960.94,3700.91 1999.42,3788.7 2039.87,3875.32 2082.29,3960.75 2126.78,4045.1 2173.24,4128.17 2221.56,4209.96 2271.86,4290.47 2323.93,4369.71 2377.96,4447.56 2433.77,4524.03 2491.35,4599.14 2550.6,4672.76 2611.62,4744.9 2674.32,4815.57 2738.69,4884.77 2804.73,4952.29 2872.35,5018.33 2941.44,5082.7 3012.11,5145.4 3084.26,5206.42 3157.98,5265.77 3233.08,5323.35 3309.55,5379.06 3387.41,5433.09 3466.64,5485.26 3547.15,5535.45 3620.01,5578.59 3693.02,5535.45 3773.53,5485.16 3852.76,5433.09 3930.62,5379.06 4007.09,5323.25 4082.19,5265.67 4155.91,5206.42 4228.06,5145.4 4298.73,5082.7 4367.82,5018.33 4435.44,4952.28 4501.48,4884.67 4565.85,4815.57 4628.55,4744.9 4689.58,4672.76 4748.83,4599.04 4806.4,4523.94 4862.21,4447.47 4916.25,4369.61 4968.31,4290.38 5018.61,4209.86 5066.93,4128.08 5113.39,4045 5157.88,3960.75 5200.3,3875.22 5240.76,3788.61 5279.24,3700.91 5315.46,3612.03 5349.71,3522.07 5381.7,3431.12 5411.62,3339.2 5439.28,3246.19 5464.67,3152.29 5487.8,3057.51 5508.57,2961.84 5527.08,2865.38 5543.22,2768.04 5557,2669.81 5568.21,2570.99 5577.07,2471.38 5583.47,2370.99 5587.31,2270.01 5588.59,2168.51 5496.56,2116.76 5412.31,2072.27 5326.78,2029.85 5240.17,1989.4 5152.47,1950.91 5063.59,1914.69 4973.63,1880.44 4882.69,1848.45 4790.76,1818.53 4697.74,1790.87 4603.85,1765.48 4509.07,1742.35 4413.39,1721.58 4316.94,1703.08 4219.6,1686.93 4121.37,1673.15 4022.55,1661.93 3922.94,1653.08 3822.55,1646.68 3721.57,1642.84 3619.99,1641.56 3518.42,1642.84 3417.43,1646.68 3317.04,1653.08 3217.43,1661.93 3118.52,1673.15 3020.38,1686.93 2923.04,1703.08 2826.49,1721.58 2730.82,1742.35 2636.04,1765.48 2542.14,1790.87 2449.22,1818.53 2357.2,1848.45 2266.25,1880.44 2176.39,1914.69 2087.51,1950.91 1999.72,1989.39 1913.1,2029.85 1827.57,2072.27 1743.32,2116.76 1651.59,2168.43 ; 1745.2,2266.76 1747.16,2278.67 1751.4,2289.99 1757.7,2300.42 1766.16,2309.48 1776.49,2316.96 1788.11,2322.18 1800.22,2324.93 1812.42,2325.22 1824.33,2323.26 1835.65,2319.02 1845.98,2312.63 1855.04,2304.16 1862.52,2293.83 1867.73,2282.21 1870.49,2270.11 1870.79,2258 1868.82,2246.09 1864.59,2234.77 1858.29,2224.34 1849.82,2215.28 1839.49,2207.8 1827.87,2202.59 1815.77,2199.83 1803.66,2199.54 1791.75,2201.5 1780.43,2205.74 1770,2212.04 1760.94,2220.5 1753.46,2230.83 1748.25,2242.45 1745.49,2254.55 1745.2,2266.76 ; 2093.54,2651.35 2100.63,2731.87 2109.39,2809.03 2120.13,2885.57 2132.72,2961.5 2147.16,3036.81 2163.36,3111.43 2181.4,3185.37 2201.2,3258.61 2222.77,3331.08 2246.11,3402.78 2271.07,3473.8 2297.78,3543.89 2326.03,3613.22 2356.05,3681.69 2387.6,3749.25 2420.69,3815.89 2455.39,3881.68 2491.63,3946.48 2529.33,4010.28 2568.55,4073.08 2609.17,4134.88 2651.32,4195.6 2694.84,4255.26 2739.76,4313.83 2785.97,4371.26 2833.57,4427.53 2882.48,4482.66 2932.68,4536.62 2984.2,4589.29 3036.94,4640.8 3090.84,4691.01 3145.95,4739.92 3202.23,4787.51 3259.73,4833.81 3318.31,4878.72 3377.96,4922.18 3427.17,4956.33 3427.17,4590.82 3380.24,4556.64 3333.68,4520.94 3287.97,4484.15 3243.24,4446.31 3199.43,4407.44 3156.59,4367.53 3114.67,4326.58 3073.72,4284.72 3033.81,4241.83 2994.94,4198.01 2957.11,4153.28 2920.37,4107.64 2884.68,4061.08 2850.08,4013.66 2816.57,3965.39 2784.3,3916.27 2753.11,3866.36 2723.15,3815.65 2694.35,3764.14 2666.77,3711.85 2640.47,3658.88 2615.38,3605.18 2591.52,3550.75 2569.07,3495.65 2547.83,3439.93 2528,3383.49 2509.45,3326.49 2492.3,3268.89 2476.56,3210.67 2462.22,3151.91 2449.34,3092.6 2437.87,3032.73 2427.86,2972.38 2419.32,2911.54 2410.98,2834.62 2093.54,2651.35 ; 2289.07,2309.63 2607.43,2493.44 2670,2465.78 2725.1,2443.32 2780.82,2422.08 2837.2,2402.25 2894.26,2383.7 2951.86,2366.56 3010.08,2350.81 3068.84,2336.47 3128.16,2323.6 3188.02,2312.13 3248.37,2302.12 3309.2,2293.57 3370.53,2286.62 3432.29,2281.12 3494.53,2277.16 3557.14,2274.78 3620.11,2273.99 3683.09,2274.78 3745.7,2277.16 3807.94,2281.12 3869.7,2286.62 3930.96,2293.57 3991.86,2302.12 4052.21,2312.13 4112.02,2323.6 4171.33,2336.47 4230.09,2350.81 4288.31,2366.56 4345.97,2383.7 4402.97,2402.25 4459.35,2422.09 4515.13,2443.32 4570.23,2465.78 4632.76,2493.45 4951.1,2309.65 4883.84,2278.23 4815.43,2248.22 4746.11,2219.96 4675.94,2193.25 4605,2168.3 4533.3,2144.96 4460.75,2123.38 4387.51,2103.58 4313.58,2085.54 4238.95,2069.34 4163.72,2054.9 4087.79,2042.31 4011.18,2031.56 3934.09,2022.81 3856.4,2015.9 3778.09,2010.91 3699.33,2007.92 3620.1,2006.92 3540.87,2007.92 3462.1,2010.91 3383.8,2015.9 3306.1,2022.81 3228.95,2031.56 3152.41,2042.31 3076.47,2054.9 3001.17,2069.34 2926.54,2085.53 2852.61,2103.58 2779.37,2123.38 2706.9,2144.96 2635.12,2168.3 2564.18,2193.24 2494.09,2219.96 2424.76,2248.22 2356.28,2278.23 2289.07,2309.63 ; 3415.45,3304.7 3416.47,3283.8 3419.63,3263.41 3424.66,3243.79 3431.57,3225.03 3440.19,3207.11 3450.42,3190.22 3462.2,3174.52 3475.42,3159.94 3489.92,3146.72 3505.7,3134.95 3522.59,3124.71 3540.5,3116.1 3559.27,3109.18 3578.89,3104.15 3599.28,3101 3620.17,3099.97 3641.07,3101 3661.46,3104.15 3681.08,3109.18 3699.85,3116.1 3717.76,3124.71 3734.65,3134.95 3750.35,3146.72 3764.93,3159.94 3778.16,3174.53 3789.93,3190.22 3800.16,3207.11 3808.78,3225.03 3815.69,3243.8 3820.72,3263.41 3823.79,3283.71 3824.9,3304.7 3823.88,3325.6 3820.72,3345.98 3815.69,3365.61 3808.78,3384.37 3800.16,3402.28 3789.93,3419.17 3778.16,3434.95 3764.93,3449.46 3750.35,3462.68 3734.65,3474.45 3717.76,3484.68 3699.85,3493.3 3680.99,3500.21 3661.38,3505.24 3641.07,3508.4 3620.17,3509.42 3599.28,3508.4 3578.89,3505.24 3559.27,3500.21 3540.5,3493.3 3522.59,3484.69 3505.7,3474.45 3489.92,3462.68 3475.42,3449.45 3462.2,3434.95 3450.42,3419.17 3440.19,3402.28 3431.57,3384.37 3424.66,3365.6 3419.63,3345.98 3416.47,3325.59 3415.45,3304.7 ; 3427.17,3590.23 3427.86,3597.41 3429.93,3604.01 3433.18,3610.01 3437.5,3615.32 3442.82,3619.66 3448.82,3622.91 3455.42,3624.97 3462.6,3625.66 3469.79,3624.97 3476.38,3622.91 3482.39,3619.66 3487.7,3615.32 3492.03,3610.01 3495.28,3604.01 3497.34,3597.41 3498.03,3590.23 3497.35,3583.04 3495.28,3576.45 3492.03,3570.44 3487.7,3565.13 3482.39,3560.8 3476.38,3557.55 3469.79,3555.48 3462.6,3554.79 3455.42,3555.49 3448.82,3557.55 3442.82,3560.8 3437.5,3565.13 3433.18,3570.44 3429.93,3576.45 3427.86,3583.04 3427.17,3590.23 ; 3427.27,3019.55 3427.96,3012.38 3430.02,3005.78 3433.27,2999.78 3437.6,2994.46 3442.82,2990.13 3448.82,2986.88 3455.51,2984.81 3462.6,2984.12 3469.79,2984.81 3476.38,2986.88 3482.39,2990.13 3487.7,2994.46 3492.03,2999.77 3495.28,3005.78 3497.35,3012.38 3498.03,3019.56 3497.35,3026.64 3495.28,3033.34 3492.03,3039.34 3487.7,3044.56 3482.39,3048.89 3476.38,3052.24 3469.79,3054.31 3462.6,3054.99 3455.52,3054.3 3448.82,3052.23 3442.82,3048.89 3437.6,3044.56 3433.27,3039.34 3430.02,3033.34 3427.95,3026.64 3427.27,3019.55 ; 3557.01,5397.57 3558.29,5384.87 3561.93,5373.06 3567.74,5362.33 3575.51,5353.08 3584.76,5345.3 3595.49,5339.5 3607.3,5335.85 3620,5334.57 3632.7,5335.85 3644.51,5339.5 3655.24,5345.3 3664.59,5353.08 3672.26,5362.33 3678.07,5373.06 3681.71,5384.87 3682.99,5397.57 3681.71,5410.26 3678.07,5422.08 3672.26,5432.81 3664.59,5442.15 3655.24,5449.83 3644.51,5455.64 3632.7,5459.28 3620,5460.56 3607.3,5459.28 3595.49,5455.64 3584.76,5449.83 3575.51,5442.15 3567.74,5432.81 3561.93,5422.08 3558.29,5410.26 3557.01,5397.57 ; 3742.03,3019.46 3742.72,3012.28 3744.79,3005.68 3748.03,2999.68 3752.37,2994.36 3757.68,2990.03 3763.68,2986.78 3770.28,2984.72 3777.46,2984.03 3784.65,2984.72 3791.24,2986.79 3797.25,2990.03 3802.56,2994.36 3806.89,2999.68 3810.14,3005.68 3812.21,3012.28 3812.9,3019.46 3812.21,3026.65 3810.14,3033.24 3806.89,3039.24 3802.56,3044.56 3797.25,3048.89 3791.24,3052.14 3784.65,3054.21 3777.46,3054.89 3770.28,3054.21 3763.68,3052.14 3757.68,3048.89 3752.36,3044.56 3748.03,3039.24 3744.79,3033.24 3742.72,3026.65 3742.03,3019.46 ; 3742.13,3590.23 3742.82,3583.04 3744.88,3576.45 3748.13,3570.44 3752.46,3565.13 3757.78,3560.8 3763.78,3557.55 3770.38,3555.48 3777.56,3554.8 3784.75,3555.49 3791.34,3557.55 3797.34,3560.8 3802.66,3565.13 3806.99,3570.45 3810.24,3576.45 3812.31,3583.04 3812.99,3590.23 3812.31,3597.41 3810.24,3604.01 3806.99,3610.01 3802.66,3615.33 3797.35,3619.66 3791.34,3622.91 3784.75,3624.97 3777.56,3625.66 3770.38,3624.97 3763.78,3622.9 3757.78,3619.66 3752.46,3615.32 3748.13,3610.01 3744.88,3604.01 3742.82,3597.41 3742.13,3590.23 ; 3820.86,4585.22 3860.11,4556.58 3906.67,4520.88 3952.38,4484.15 3997.11,4446.31 4040.92,4407.44 4083.76,4367.53 4125.68,4326.59 4166.63,4284.66 4206.54,4241.83 4245.41,4198.01 4283.24,4153.28 4319.98,4107.58 4355.67,4061.01 4390.27,4013.6 4423.77,3965.33 4456.06,3916.21 4487.24,3866.3 4517.2,3815.59 4546,3764.08 4573.59,3711.85 4599.88,3658.82 4624.97,3605.12 4648.82,3550.75 4671.28,3495.65 4692.52,3439.87 4712.35,3383.49 4730.89,3326.5 4748.05,3268.83 4763.79,3210.61 4778.13,3151.85 4791.01,3092.54 4802.48,3032.73 4812.49,2972.39 4821.03,2911.49 4829.38,2834.54 5146.81,2651.26 5139.72,2731.88 5130.96,2808.96 5120.22,2885.57 5107.63,2961.5 5093.19,3036.74 5076.99,3111.36 5058.95,3185.29 5039.15,3258.53 5017.57,3331.08 4994.23,3402.78 4969.28,3473.72 4942.57,3543.89 4914.32,3613.22 4884.3,3681.62 4852.74,3749.18 4819.65,3815.89 4784.95,3881.61 4748.72,3946.41 4711.02,4010.2 4671.79,4073 4631.18,4134.8 4589.03,4195.53 4545.5,4255.18 4500.59,4313.76 4454.38,4371.26 4406.78,4427.53 4357.87,4482.65 4307.67,4536.55 4256.15,4589.29 4203.41,4640.81 4149.52,4691.02 4094.39,4739.92 4038.12,4787.51 3980.61,4833.73 3922.04,4878.64 3862.39,4922.17 3820.87,4950.99 3820.86,4585.22 ; 5369.21,2254.55 5369.51,2266.76 5372.26,2278.87 5377.48,2290.48 5384.96,2300.82 5394.01,2309.28 5404.45,2315.58 5415.77,2319.81 5427.68,2321.78 5439.78,2321.48 5451.89,2318.73 5463.5,2313.51 5473.84,2306.03 5482.3,2296.98 5488.7,2286.55 5492.93,2275.22 5494.9,2263.32 5494.6,2251.21 5491.85,2239.1 5486.63,2227.49 5479.15,2217.16 5470.1,2208.69 5459.66,2202.39 5448.35,2198.16 5436.44,2196.19 5424.23,2196.48 5412.12,2199.24 5400.51,2204.46 5390.18,2211.94 5381.71,2220.99 5375.41,2231.33 5371.18,2242.65 5369.21,2254.55

## Silkscreen, mask and mechanical layers (free items; w line width, h text height)
Top Overlay:
  text "+  -" at 3555,5264.64 h100
  text "+  -" at 2103.97,2345.18 h100 r120
Bottom Overlay:
  text "+  -" at 5236.03,2450.18 h100 r240
Document:
  lines w10: 1655,2170 5069.86,4141.58 ; 2173.62,4139.98 5588.49,2168.41 ; 3620.01,1642.84 3619.98,5577.96

## Text inside footprints (layer, text, board x,y; h text height)
P2: Top Overlay "MPU6050" at 3365,1715 h80
U1: Top Overlay "VOUT" at 3331.56,4909.87 h100 r40; Top Overlay "VIN" at 2803.7,4465.5 h100 r40; Top Overlay "AMS-1117-5.0-Module" at 2618.35,4709.57 h100 r40
U3: Top Overlay "ESP32-WROOM-MODULE" at 4392,2498 h80 r90; Top Overlay "USB" at 4750,3981.11 h100
U6: Top Overlay "SCL" at 3920,3215.31 h39.37; Top Overlay "SDA" at 3920,3315.31 h39.37; Top Overlay "VCC" at 3310,3090.31 h39.37; Top Overlay "GND" at 3305,3455.31 h39.37